# Altium PCB XLIN1.7-2048SQ TE0_MEZ.PcbDoc
Units mm, origin at the board's own origin, x right, y up, seen from the top; angles counter-clockwise.
Board outline 70 x 70 mm, 2 copper layers (Top Layer, Bottom Layer); 7 components, 29 nets, 103 pads, 0 vias.
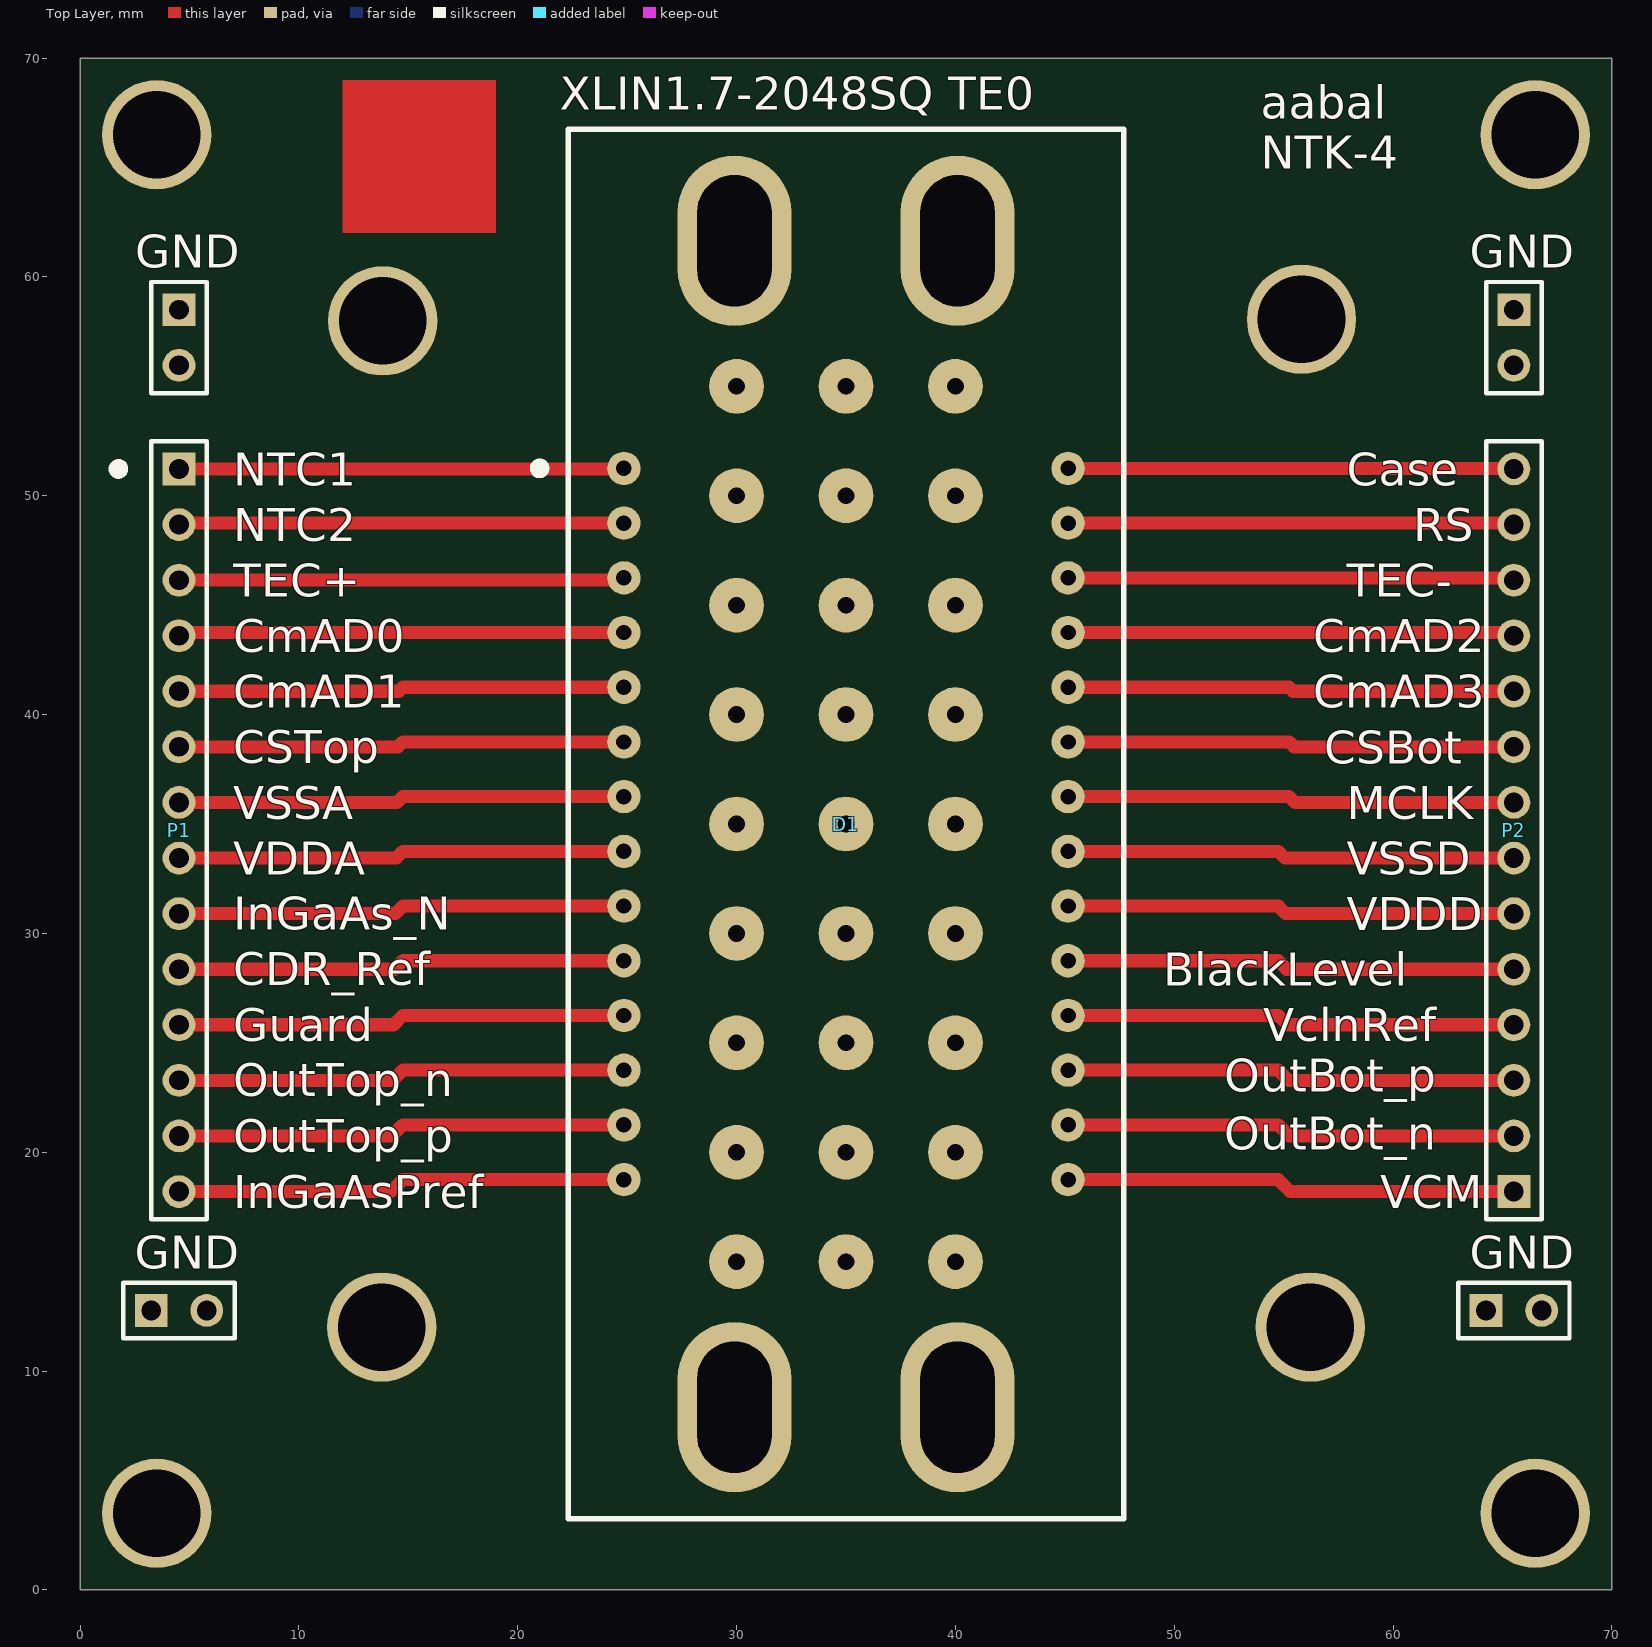
[diagram p0: Top Layer view]
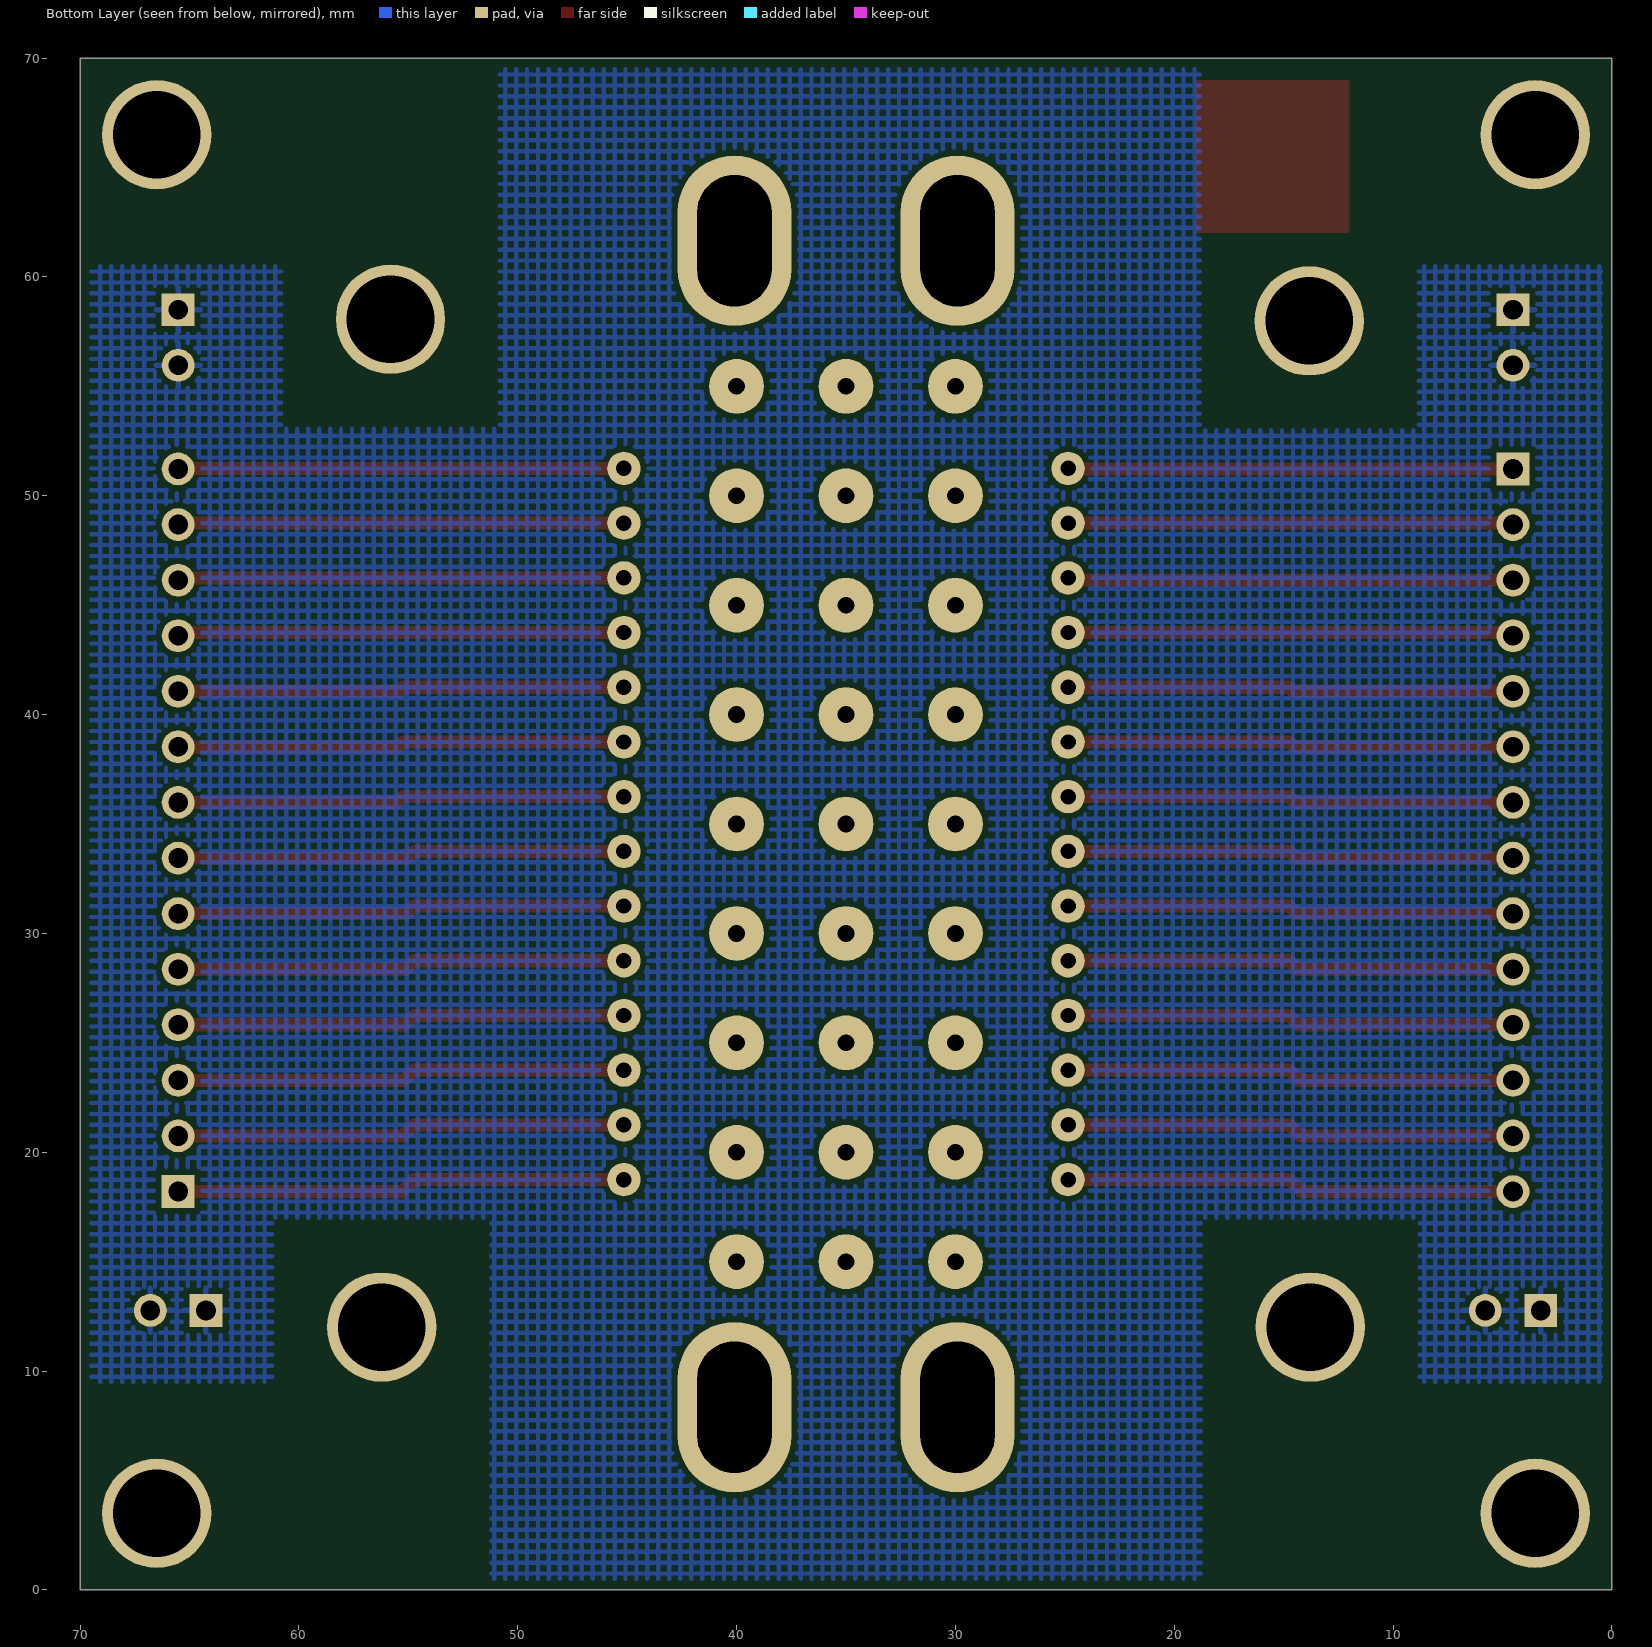
[diagram p1: Bottom Layer view, seen from below]

## Layer stack, top to bottom
Top Solder: solder mask 0.0102, Solder Resist, Dk 3.5
Top Layer: signal copper 0.0356
Dielectric 1: dielectric 0.32, FR-4, Dk 4.8
Bottom Layer: signal copper 0.0356
Bottom Solder: solder mask 0.0102, Solder Resist, Dk 3.5

## Board outline
0,0 70,0 70,70 0,70

## Design rules (kind name [scope] priority, off if disabled: settings)
Clearance [All] p1: gap=0.254 ignorepadtopadclearanceinfootprint=FALSE except(0: Arc-Hole Track-Hole SMDPad-Hole THPad-Hole Via-Hole Fill-Hole Poly-Hole Region-Hole Text-Hole)
PolygonConnect [All] p1: connectstyle=Relief reliefconductorwidth=0.254 reliefentries=4 polygonreliefangle="90 Angle" airgapwidth=0.254
RoutingVias [All] p1: holewidth=0.711 width=1.27 viastyle="Through Hole" minholewidth=0.711 minwidth=1.27 maxholewidth=0.711 maxwidth=1.27
SolderMaskExpansion [All] p1: expansion=0.102
Width [All] p1: maxlimit=0.6 minlimit=0.254 preferedwidth=0.254 minimp=50.000000 maximp=50.000000 favimp=50.000000
30 further rules are at their usual default settings.

## Classes and differential pairs
component class "XLIN1.7-2048SQ TE0_MEZ": D1 P1 P2

## Components (designator, comment, footprint, x,y, rotation, side; value= is the part's Value field where it differs from the comment)
D1 "XLIN1.7-2048SQ TE0" "XLIN1.7-2048SQ TE0" 35,35 r0 top
GND "Comment" HDR1X2 65.52,58.5 r270 top
GND "Comment" HDR1X2 4.52,58.5 r270 top
GND "Comment" HDR1X2 64.25,12.77 r0 top
GND "Comment" HDR1X2 3.25,12.77 r0 top
P1 "Header 14" HDR1X14 4.52,51.225 r270 top
P2 "Header 14" HDR1X14 65.52,18.205 r90 top

## Footprints (in the part's own frame and the unit in brackets; to place one, negate y for a bottom-side part, rotate by r counter-clockwise, add the part's x,y. Pads: shape width x height; smd on the part's side, far side on the other; paste and mask are expansions set on the pad)
HDR1X2 [mm] "Connector; Header; 2 Position"
  rect 1.5x1.5 hole 0.9: 1(0,0)
  round 1.5 hole 0.9: 2(2.54,0)
  silkscreen extent -1.27,-1.27 3.81,1.27
HDR1X14 [mm] "Connector; Header; 14 Position"
  rect 1.5x1.5 hole 0.9: 1(0,0)
  round 1.5 hole 0.9: 2(2.54,0) 3(5.08,0) 4(7.62,0) 5(10.16,0) 6(12.7,0) 7(15.24,0) 8(17.78,0) 9(20.32,0) 10(22.86,0) 11(25.4,0) 12(27.94,0) 13(30.48,0) 14(33.02,0)
  silkscreen extent -1.27,-1.27 34.29,1.27
"XLIN1.7-2048SQ TE0" [mm]
  oval 5.2x7.8 hole 3.4 slot 6 at 90 deg: 0(-5.1,-26.65) 0(-5.1,26.65) 0(5.1,-26.65) 0(5.1,26.65)
  round 2.5 hole 0.762: 0(-5,-20) 0(-5,-15) 0(-5,-10) 0(-5,-5) 0(-5,0) 0(-5,5) 0(-5,10) 0(-5,15) 0(-5,20) 0(0,-20) 0(0,-15) 0(0,-10) 0(0,-5) 0(0,0) 0(0,5) 0(0,10) 0(0,15) 0(0,20) 0(5,-20) 0(5,-15) 0(5,-10) 0(5,-5) 0(5,0) 0(5,5) 0(5,10) 0(5,15) 0(5,20)
  round 1.524 hole 0.7: 1(-10.15,16.25) 2(-10.15,13.75) 3(-10.15,11.25) 4(-10.15,8.75) 5(-10.15,6.25) 6(-10.15,3.75) 7(-10.15,1.25) 8(-10.15,-1.25) 9(-10.15,-3.75) 10(-10.15,-6.25) 11(-10.15,-8.75) 12(-10.15,-11.25) 13(-10.15,-13.75) 14(-10.15,-16.25) 15(10.15,-16.25) 16(10.15,-13.75) 17(10.15,-11.25) 18(10.15,-8.75) 19(10.15,-6.25) 20(10.15,-3.75) 21(10.15,-1.25) 22(10.15,1.25) 23(10.15,3.75) 24(10.15,6.25) 25(10.15,8.75) 26(10.15,11.25) 27(10.15,13.75) 28(10.15,16.25)
  silkscreen extent -14.2,-31.75 12.7,31.75

## Part data
P1 P2: "Header, 14-Pin", LatestRevisionDate=17-Jul-2002, LatestRevisionNote="Re-released for DXP Platform.", Publisher="Altium Limited"

## Free pads (board coordinates)
  round 5 hole 4: 0(3.5,3.5) 0(3.5,66.5) 0(13.778,12.013) 0(13.829,57.987) 0(55.815,58.063) 0(56.222,12.013) 0(66.5,3.5) 0(66.5,66.5)

## Nets (pads, with @x,y where several pads share a name; then routed paths per layer and width w, separated by ;. In a path a pad name is that pad's centre, name@x,y a point inside that pad or via, vN(x,y) a via of type N, cw(c..) or ccw(c..) an arc to the next point about the centre after c; other vN are vias at no path point)
BlackLevel: D1.19 P2.5 | length 20.5
  Top Layer w0.6: D1.19 54.75,28.75 55.135,28.365 P2.5
Case: D1.28 P2.14 | length 20.3
  Top Layer w0.6: D1.28 P2.14@65.495,51.25
CDR_Ref: D1.10 P1.10 | length 20.5
  Top Layer w0.6: P1.10 14.365,28.365 14.75,28.75 D1.10
CmAD0: D1.4 P1.4 | length 20.2
  Top Layer w0.6: P1.4@4.665,43.75 D1.4
CmAD1: D1.5 P1.5 | length 20.4
  Top Layer w0.6: P1.5 14.565,41.065 14.75,41.25 D1.5
CmAD2: D1.25 P2.11 | length 20.2
  Top Layer w0.6: D1.25 P2.11@65.375,43.75
CmAD3: D1.24 P2.10 | length 20.4
  Top Layer w0.6: D1.24 55.25,41.25 55.435,41.065 P2.10
CSBot: D1.23 P2.9 | length 20.5
  Top Layer w0.6: D1.23 55.25,38.75 55.475,38.525 P2.9
CSTop: D1.6 P1.6 | length 20.4
  Top Layer w0.6: P1.6 14.525,38.525 14.75,38.75 D1.6
GND: GND.1 GND.2
Guard: D1.11 P1.11 | length 20.5
  Top Layer w0.6: P1.11 14.325,25.825 14.75,26.25 D1.11
InGaAs_N: D1.9 P1.9 | length 20.5
  Top Layer w0.6: P1.9 14.405,30.905 14.75,31.25 D1.9
InGaAsPref: D1.14 P1.14 | length 20.6
  Top Layer w0.6: P1.14 14.205,18.205 14.75,18.75 D1.14
MCLK: D1.22 P2.8 | length 20.5
  Top Layer w0.6: D1.22 55.25,36.25 55.515,35.985 P2.8
NTC1: D1.1 P1.1 | length 20.3
  Top Layer w0.6: P1.1 24.825,51.225 D1.1
NTC2: D1.2 P1.2 | length 20.3
  Top Layer w0.6: P1.2@4.585,48.75 D1.2
OutBot_n: D1.16 P2.2 | length 20.9
  Top Layer w0.6: D1.16 54.75,21.25 55.255,20.745 P2.2 P2.2@65.275,20.5
OutBot_p: D1.17 P2.3 | length 20.6
  Top Layer w0.6: D1.17 54.75,23.75 55.215,23.285 P2.3
OutTop_n: D1.12 P1.12 | length 20.5
  Top Layer w0.6: P1.12 14.285,23.285 14.75,23.75 D1.12
OutTop_p: D1.13 P1.13 | length 20.5
  Top Layer w0.6: P1.13 14.245,20.745 14.75,21.25 D1.13
RS: D1.27 P2.13 | length 20.3
  Top Layer w0.6: D1.27 P2.13@65.455,48.75
TEC+: D1.3 P1.3 | length 20.4
  Top Layer w0.6: P1.3 24.745,46.145 D1.3
TEC-: D1.26 P2.12 | length 20.3
  Top Layer w0.6: D1.26 P2.12@65.415,46.25
VclnRef: D1.18 P2.4 | length 20.5
  Top Layer w0.6: D1.18 54.75,26.25 55.175,25.825 P2.4
VCM: D1.15 P2.1 | length 20.6
  Top Layer w0.6: D1.15 54.75,18.75 55.295,18.205 P2.1
VDDA: D1.8 P1.8 | length 20.5
  Top Layer w0.6: P1.8 14.445,33.445 14.75,33.75 D1.8
VDDD: D1.20 P2.6 | length 20.5
  Top Layer w0.6: D1.20 54.75,31.25 55.095,30.905 P2.6
VSSA: D1.7 P1.7 | length 20.4
  Top Layer w0.6: P1.7 14.485,35.985 14.75,36.25 D1.7
VSSD: D1.21 P2.7 | length 20.5
  Top Layer w0.6: D1.21 54.75,33.75 55.055,33.445 P2.7
pads on no net: D1.0

## Polygon pours and split planes (outlines as drawn)
GND on Bottom Layer "GND_L02_P058" (hatched 90Degree grid 0.5 track 0.2, remove dead copper, pour order 58): 0.5,69.5 69.5,69.5 69.5,0.5 0.5,0.5
GND on Bottom Layer "GND_L02_P040" (hatched 90Degree grid 0.5 track 0.2, remove dead copper, pour order 40): 0.25,8.5
GND on Bottom Layer "GND_L02_P036" (hatched 90Degree grid 0.5 track 0.2, remove dead copper, pour order 36): 0,61.5
GND on Bottom Layer "GND_L02_P022" (hatched 90Degree grid 0.6 track 0.2, remove dead copper, pour order 22): 2,54
GND on Bottom Layer "GND_L02_P020" (hatched 90Degree grid 0.6 track 0.2, remove dead copper, pour order 20): 2,54
no net on Bottom Layer "NONET_L02_P002" (hatched 90Degree grid 0.6 track 0.2, remove dead copper, pour order 2): 1,0

## Other copper
Top Layer:
  rectangle: 12,62 19,69
Bottom Layer:
  pour cut-out: 7.75,62.75
  pour cut-out: 7.75,62.75
  pour cut-out: 9.5,70 9.5,60.5 0,60.5 0,70
  pour cut-out: 70,70 70,60.5 60.5,60.5 60.5,70
  pour cut-out: 70,9.5 70,0 60.5,0 60.5,9.5
  pour cut-out: 9.5,9.5 9.5,0 0,0 0,9.5
  pour cut-out: 3.5,8.5
  pour cut-out: 3.5,8.5
  pour cut-out: 18.778,17.013 18.778,0 8.778,0 8.778,17.013
  pour cut-out: 13.778,12.013
  pour cut-out: 61.222,17.013 61.222,0 51.222,0 51.222,17.013
  pour cut-out: 60.815,70 60.815,53.063 50.815,53.063 50.815,70
  pour cut-out: 7.829,58.987
  pour cut-out: 18.829,70 18.829,52.987 8.829,52.987 8.829,70
  pour cut-out: 13.829,62.987
  pour cut-out: 13.829,61.987

## Silkscreen, mask and mechanical layers (free items; w line width, h text height)
Top Overlay:
  circle w0.5: c1.75,51.225 r0.2
  text "aabal / NTK-4" at 53.946,64.951 h1.52
  text "NTC1" at 7,50.463 h1.52
  text "Case" at 57.879,50.463 h1.52
  text "NTC2" at 7,47.923 h1.52
  text "RS" at 60.926,47.923 h1.52
  text "TEC+" at 7,45.383 h1.52
  text "TEC-" at 57.879,45.383 h1.52
  text "CmAD0" at 7,42.843 h1.52
  text "CmAD2" at 56.356,42.843 h1.52
  text "CmAD1" at 7,40.303 h1.52
  text "CmAD3" at 56.356,40.303 h1.52
  text "CSTop" at 7,37.767 h1.52
  text "CSBot" at 56.864,37.763 h1.52
  text "VSSA" at 7,35.223 h1.52
  text "MCLK" at 57.879,35.223 h1.52
  text "VDDA" at 7,32.683 h1.52
  text "VSSD" at 57.879,32.683 h1.52
  text "InGaAs_N" at 7,30.17 h1.52
  text "VDDD" at 57.879,30.143 h1.52
  text "CDR_Ref" at 7,27.632 h1.52
  text "BlackLevel" at 49.5,27.603 h1.52
  text "Guard" at 7,25.063 h1.52
  text "VclnRef" at 54.071,25.063 h1.52
  text "OutBot_p" at 52.293,22.756 h1.52
  text "OutTop_n" at 7,22.556 h1.52
  text "OutBot_n" at 52.293,20.112 h1.52
  text "OutTop_p" at 7,19.991 h1.52
  text "InGaAsPref" at 7,17.443 h1.52
  text "VCM" at 59.403,17.443 h1.52
Mechanical 1:
  the board outline again, w0.254